# EAGLE board Element14_AudioServo (EAGLE 6.91.1)

Size 160 x 100 mm. Coordinates in mm from the lower left corner, seen from the top.
Outline: 0,0 160,0 160,100 0,100 0,0
Copper layers (1*16): Top 0.035mm / dielectric 1.5mm / Bottom 0.035mm
Design rules "default": minimum track width 10mil, minimum drill 24mil, track to track 8mil, track to pad 8mil, pad to pad 8mil, via to via 8mil, smd to smd 8mil, copper to edge 40mil, drill to drill 8mil, minimum pad ring 10mil, minimum via ring 8mil, stop-mask expansion 4mil, vias tented up to drill 0mil, thermal gap 10mil
Net classes: 0 default: width 0.254 mm, clearance 0.254 mm; 1 power: width 0.61 mm, drill 0.61 mm, clearance 0.254 mm; 2 gnd: width 0.305 mm, drill 0.559 mm, clearance 0.254 mm; 3 usbvcc: width 0.508 mm, drill 0.61 mm, clearance 0.254 mm; 4 aref: width 0.406 mm, drill 0.61 mm, clearance 0.254 mm

## Footprints (pad centres in the part's own frame; a part is rotated, then mirrored left to right if it is on the bottom)
DIP8 = drill 0.97 long: 1 -5.08,-3.81; 2 -2.54,-3.81; 3 0,-3.81; 4 2.54,-3.81; 5 2.54,3.81; 6 0,3.81; 7 -2.54,3.81; 8 -5.08,3.81
C2.5-3 = drill 0.813 pad 1.6 octagon: 1 -1.27,0; 2 1.27,0
CPOL-RADIAL-10UF-25V = drill 0.7 pad 1.651 square: 1 1.27,0 | drill 0.7 pad 1.651: 2 -1.27,0
D-5 = drill 0.813 octagon: A 2.54,0; C -2.54,0
STEREOJACK2.5MM_STEREOJACK2.5MM = drill 1.1 pad 1.93: RING1 2.5,-1.85; RING2 2.5,1.85; TIP 4.5,0 | drill 1 pad 1.93: SHIELD -2.4,0 | hole 1.2: 0,0
0204/5 = drill 0.813 octagon: 1 -2.54,0; 2 2.54,0
PVG3 = smd 1.4 x 1.3: P$1 2.54,5.08 | smd 1.1 x 1.3: P$2 3.69,1.38; P$3 1.39,1.38
1X02 = drill 1.016 pad 1.88: 1 0,0; 2 2.54,0
DIP14 = drill 0.813 long: 1 1.27,1.27; 2 3.81,1.27; 3 6.35,1.27; 4 8.89,1.27; 5 11.43,1.27; 6 13.97,1.27; 7 16.51,1.27; 8 16.51,8.89; 9 13.97,8.89; 10 11.43,8.89; 11 8.89,8.89; 12 6.35,8.89; 13 3.81,8.89; 14 1.27,8.89
SMARTLED-TTW = smd 0.8 x 0.5: A 0,-0.875; C 0,0.875 | smd 0.35 x 0.35: A@1 0,-0.5; C@1 0,0.5
C0805 = smd 1.3 x 1.5: 1 -0.85,0; 2 0.85,0
DIL-08 = drill 0.813 long: 1 -3.81,-3.81; 2 -1.27,-3.81; 3 1.27,-3.81; 4 3.81,-3.81; 5 3.81,3.81; 6 1.27,3.81; 7 -1.27,3.81; 8 -3.81,3.81
MOLEX-1X3 = drill 1.016 pad 1.88 square: 1 0,0 | drill 1.016 pad 1.88: 2 2.54,0; 3 5.08,0
SOT23-EBC = smd 1 x 1.4: B 0.95,-1.1; C 0,1.1; E -0.95,-1.1

## Placement (x,y rotation side)
AUDIO_AMP:AMP1  MC1458  [DIP8]  -22.86,6.35 0 top  (outside the outline)
AUDIO_AMP:C1  0.1uF  [C2.5-3]  -58.42,3.81 0 top  (outside the outline)
AUDIO_AMP:C2  10uF  [CPOL-RADIAL-10UF-25V]  -31.75,17.78 0 top  (outside the outline)
AUDIO_AMP:C6  0.1uF  [C2.5-3]  -25.4,17.78 0 top  (outside the outline)
AUDIO_AMP:D1  [D-5]  -25.4,34.29 0 top  (outside the outline)
AUDIO_AMP:JP1  [STEREOJACK2.5MM_STEREOJACK2.5MM]  -40.64,16.51 0 top  (outside the outline)
AUDIO_AMP:R1  1k  [0204/5]  -35.56,24.13 0 top  (outside the outline)
AUDIO_AMP:R2  1k  [PVG3]  -36.83,1.27 0 top  (outside the outline)
AUDIO_AMP:R3  47k  [0204/5]  -48.26,24.13 0 top  (outside the outline)
AUDIO_AMP:R4  47k  [0204/5]  -21.59,30.48 0 top  (outside the outline)
AUDIO_AMP:R5  10k  [0204/5]  -34.29,30.48 0 top  (outside the outline)
AUDIO_AMP:R6  1k  [PVG3]  -44.45,1.27 0 top  (outside the outline)
AUDIO_AMP:R7  10k  [0204/5]  -46.99,30.48 0 top  (outside the outline)
AUDIO_AMP:R14  2.2k  [0204/5]  -57.15,16.51 0 top  (outside the outline)
AUDIO_AMP:R15  10k  [0204/5]  -22.86,24.13 0 top  (outside the outline)
POWER:JP1  M02PTH  [1X02]  -22.86,82.55 0 top  (outside the outline)
SWITCH:74HC4066  U1  [DIP14]  -31.75,39.37 0 top  (outside the outline)
SWITCH:LED1  [SMARTLED-TTW]  -35.56,40.64 0 top  (outside the outline)
SWITCH:R3  [0204/5]  -48.26,39.37 0 top  (outside the outline)
TIMER:C1  0.01uF  [C2.5-3]  -31.75,74.93 0 top  (outside the outline)
TIMER:C2  0.1uF  [C2.5-3]  -41.91,74.93 0 top  (outside the outline)
TIMER:C3  470uF  [C0805]  -52.07,74.93 0 top  (outside the outline)
TIMER:IC1  NE555  [DIL-08]  -19.05,64.77 0 top  (outside the outline)
TIMER:JP1  [MOLEX-1X3]  -62.23,-3.81 0 top  (outside the outline)
TIMER:R1  220k  [0204/5]  -41.91,62.23 0 top  (outside the outline)
TIMER:R2  4.7k  [0204/5]  -52.07,62.23 0 top  (outside the outline)
TIMER:R3  10k  [0204/5]  -62.23,62.23 0 top  (outside the outline)
TIMER:R4  10k  [0204/5]  -21.59,74.93 0 top  (outside the outline)
TIMER:R6  50k  [PVG3]  -31.75,59.69 0 top  (outside the outline)
TIMER:T1  [SOT23-EBC]  -60.96,73.66 0 top  (outside the outline)

## Library data of the parts
AUDIO_AMP:AMP1 = El14_AudioServo; DK: 296-1403-5-ND; PARTNO: MC1458P
AUDIO_AMP:C1 AUDIO_AMP:C6 TIMER:C1 TIMER:C2 = capacitor-wima
AUDIO_AMP:C2 = SparkFun-Capacitors
AUDIO_AMP:D1 = diode; PARTNO: 1N914
AUDIO_AMP:JP1 POWER:JP1 TIMER:JP1 = SparkFun-Connectors
AUDIO_AMP:R1 AUDIO_AMP:R3-AUDIO_AMP:R5 AUDIO_AMP:R7 AUDIO_AMP:R14 AUDIO_AMP:R15 SWITCH:R3 TIMER:C3 TIMER:R1-TIMER:R4 = resistor
AUDIO_AMP:R2 AUDIO_AMP:R6 SWITCH:74HC4066 TIMER:R6 = El14_AudioServo
SWITCH:LED1 = arduino_Uno_Rev3-02-TH
TIMER:IC1 = st-microelectronics; MF: Arrow Electronics; MPN: NE555N; OC_FARNELL: 1467742; OC_NEWARK: 89K1486
TIMER:T1 = transistor

## Nets
+5V: POWER:JP1.2 SWITCH:74HC4066.14 SWITCH:R3.2 TIMER:C3.1 TIMER:IC1.4 TIMER:IC1.8 TIMER:JP1.2 TIMER:R1.2 TIMER:R4.1
AUDIO_AMP:AUDIO_IN: AUDIO_AMP:C1.1 AUDIO_AMP:JP1.TIP
AUDIO_AMP:N$1: AUDIO_AMP:AMP1.2 AUDIO_AMP:R1.2 AUDIO_AMP:R2.P$1
AUDIO_AMP:N$2: AUDIO_AMP:C1.2 AUDIO_AMP:R1.1
AUDIO_AMP:N$4: AUDIO_AMP:AMP1.7 AUDIO_AMP:D1.A
AUDIO_AMP:N$5: AUDIO_AMP:AMP1.3 AUDIO_AMP:R3.1 AUDIO_AMP:R4.2
AUDIO_AMP:N$6: AUDIO_AMP:R6.P$2 AUDIO_AMP:R7.2
AUDIO_AMP:N$7: AUDIO_AMP:AMP1.1 AUDIO_AMP:AMP1.6 AUDIO_AMP:R2.P$2 AUDIO_AMP:R2.P$3
AUDIO_AMP:N$8: AUDIO_AMP:C2.1 AUDIO_AMP:D1.C AUDIO_AMP:R14.2
AUDIO_AMP:N$9: AUDIO_AMP:R5.1 AUDIO_AMP:R6.P$1
AUDIO_AMP:R6: AUDIO_AMP:AMP1.5 AUDIO_AMP:R6.P$3
GND: AUDIO_AMP:AMP1.4 AUDIO_AMP:C2.2 AUDIO_AMP:C6.1 AUDIO_AMP:JP1.RING1 AUDIO_AMP:R4.1 AUDIO_AMP:R7.1 AUDIO_AMP:R15.2 POWER:JP1.1 SWITCH:74HC4066.2 SWITCH:74HC4066.5 SWITCH:74HC4066.6 SWITCH:74HC4066.7 TIMER:C1.2 TIMER:C2.2 TIMER:C3.2 TIMER:IC1.1 TIMER:JP1.3 TIMER:T1.E
N$1: AUDIO_AMP:AMP1.8 AUDIO_AMP:C6.2 AUDIO_AMP:R3.2 AUDIO_AMP:R5.2
N$2: SWITCH:74HC4066.10 TIMER:R6.P$3
N$3: AUDIO_AMP:R14.1 AUDIO_AMP:R15.1 SWITCH:74HC4066.12 SWITCH:74HC4066.13
N$4: SWITCH:74HC4066.11 TIMER:R2.2 TIMER:R6.P$1
SWITCH:N$3: SWITCH:74HC4066.1 SWITCH:LED1.C@1
SWITCH:N$4: SWITCH:LED1.A@1 SWITCH:R3.1
TIMER:N$1: TIMER:C1.1 TIMER:IC1.5
TIMER:N$3: TIMER:IC1.3 TIMER:R3.2
TIMER:N$4: TIMER:R3.1 TIMER:T1.B
TIMER:N$7: TIMER:C2.1 TIMER:IC1.2 TIMER:IC1.6 TIMER:R2.1
TIMER:N$9: TIMER:IC1.7 TIMER:R1.1 TIMER:R6.P$2
TIMER:SERVO_OUT: TIMER:JP1.1 TIMER:R4.2 TIMER:T1.C

## Tracks (layer width: path | path; a pad name or v marks a point on that pad's centre or on a via)
+5V  (8 unrouted)
AUDIO_AMP:AUDIO_IN  (1 unrouted)
AUDIO_AMP:N$1  (2 unrouted)
AUDIO_AMP:N$2  (1 unrouted)
AUDIO_AMP:N$4  (1 unrouted)
AUDIO_AMP:N$5  (2 unrouted)
AUDIO_AMP:N$6  (1 unrouted)
AUDIO_AMP:N$7  (3 unrouted)
AUDIO_AMP:N$8  (2 unrouted)
AUDIO_AMP:N$9  (1 unrouted)
AUDIO_AMP:R6  (1 unrouted)
GND  (17 unrouted)
N$1  (3 unrouted)
N$2  (1 unrouted)
N$3  (3 unrouted)
N$4  (2 unrouted)
SWITCH:N$3  (1 unrouted)
SWITCH:N$4  (1 unrouted)
TIMER:N$1  (1 unrouted)
TIMER:N$3  (1 unrouted)
TIMER:N$4  (1 unrouted)
TIMER:N$7  (3 unrouted)
TIMER:N$9  (2 unrouted)
TIMER:SERVO_OUT  (2 unrouted)